# EAGLE board Board_v1 (EAGLE 9.2.2)
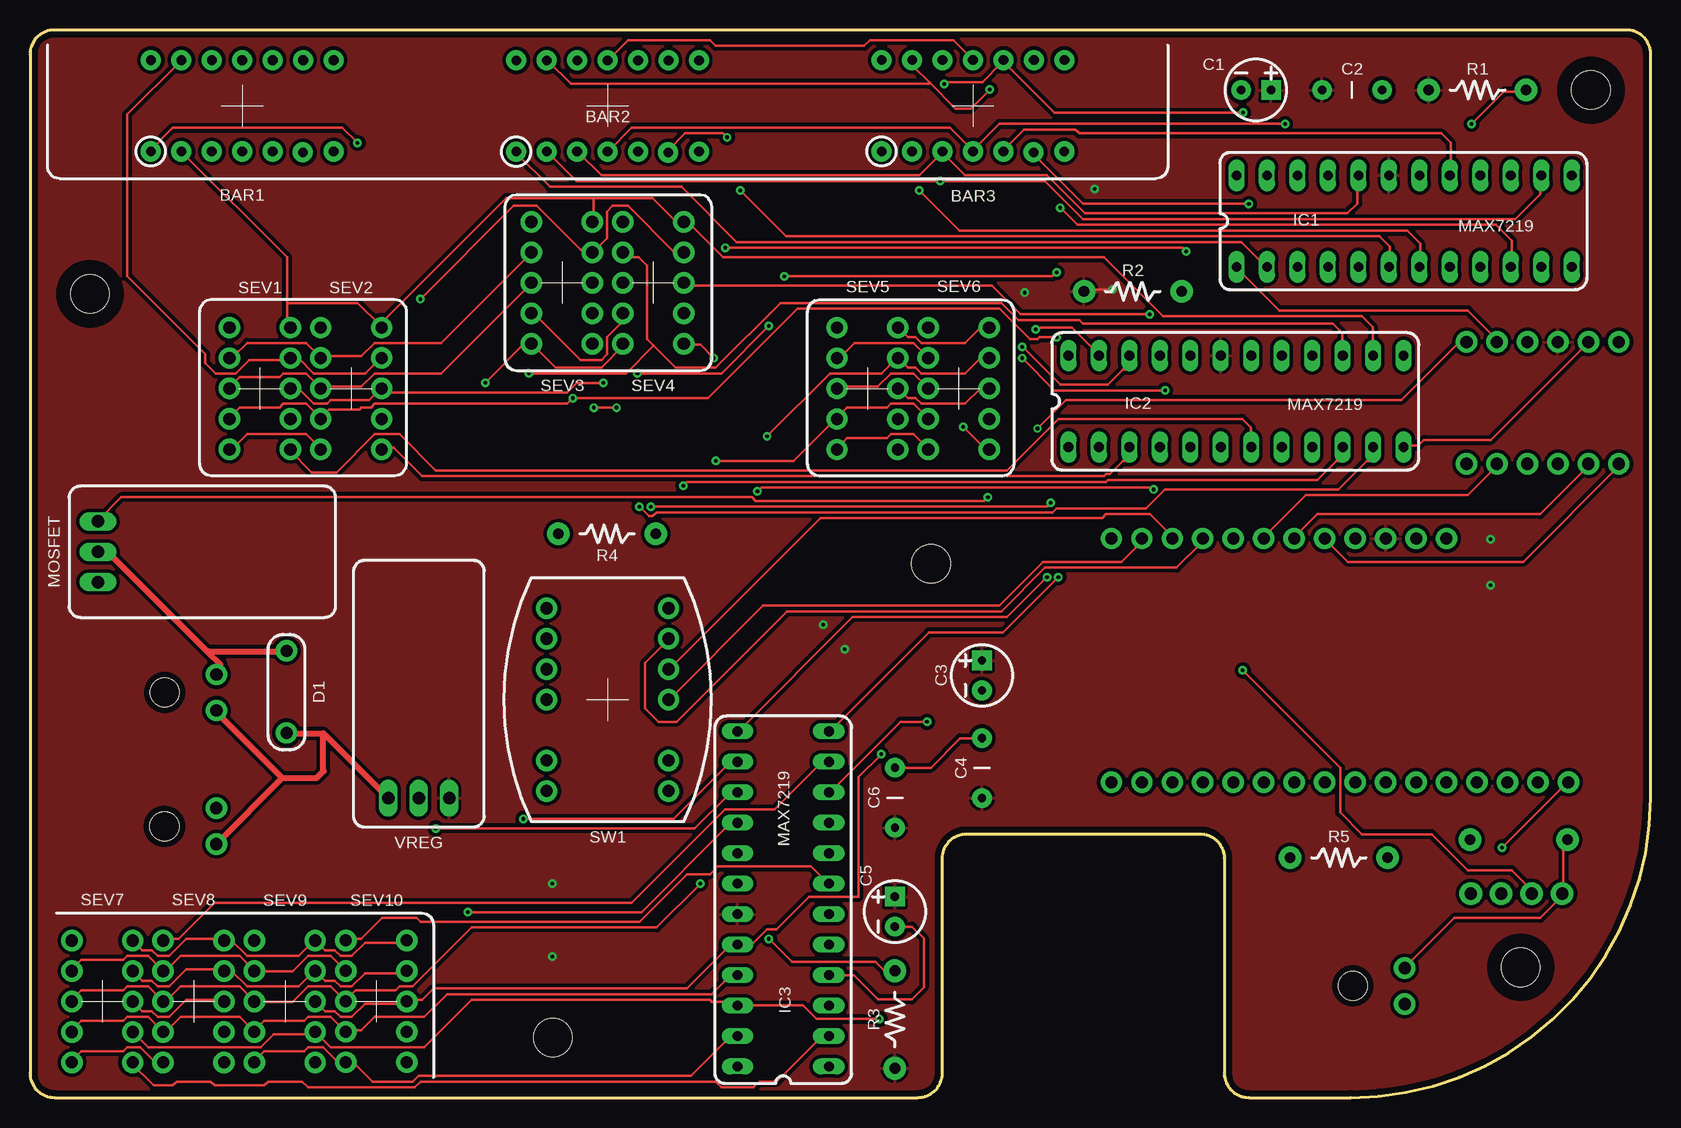
[diagram p0: board, top side]
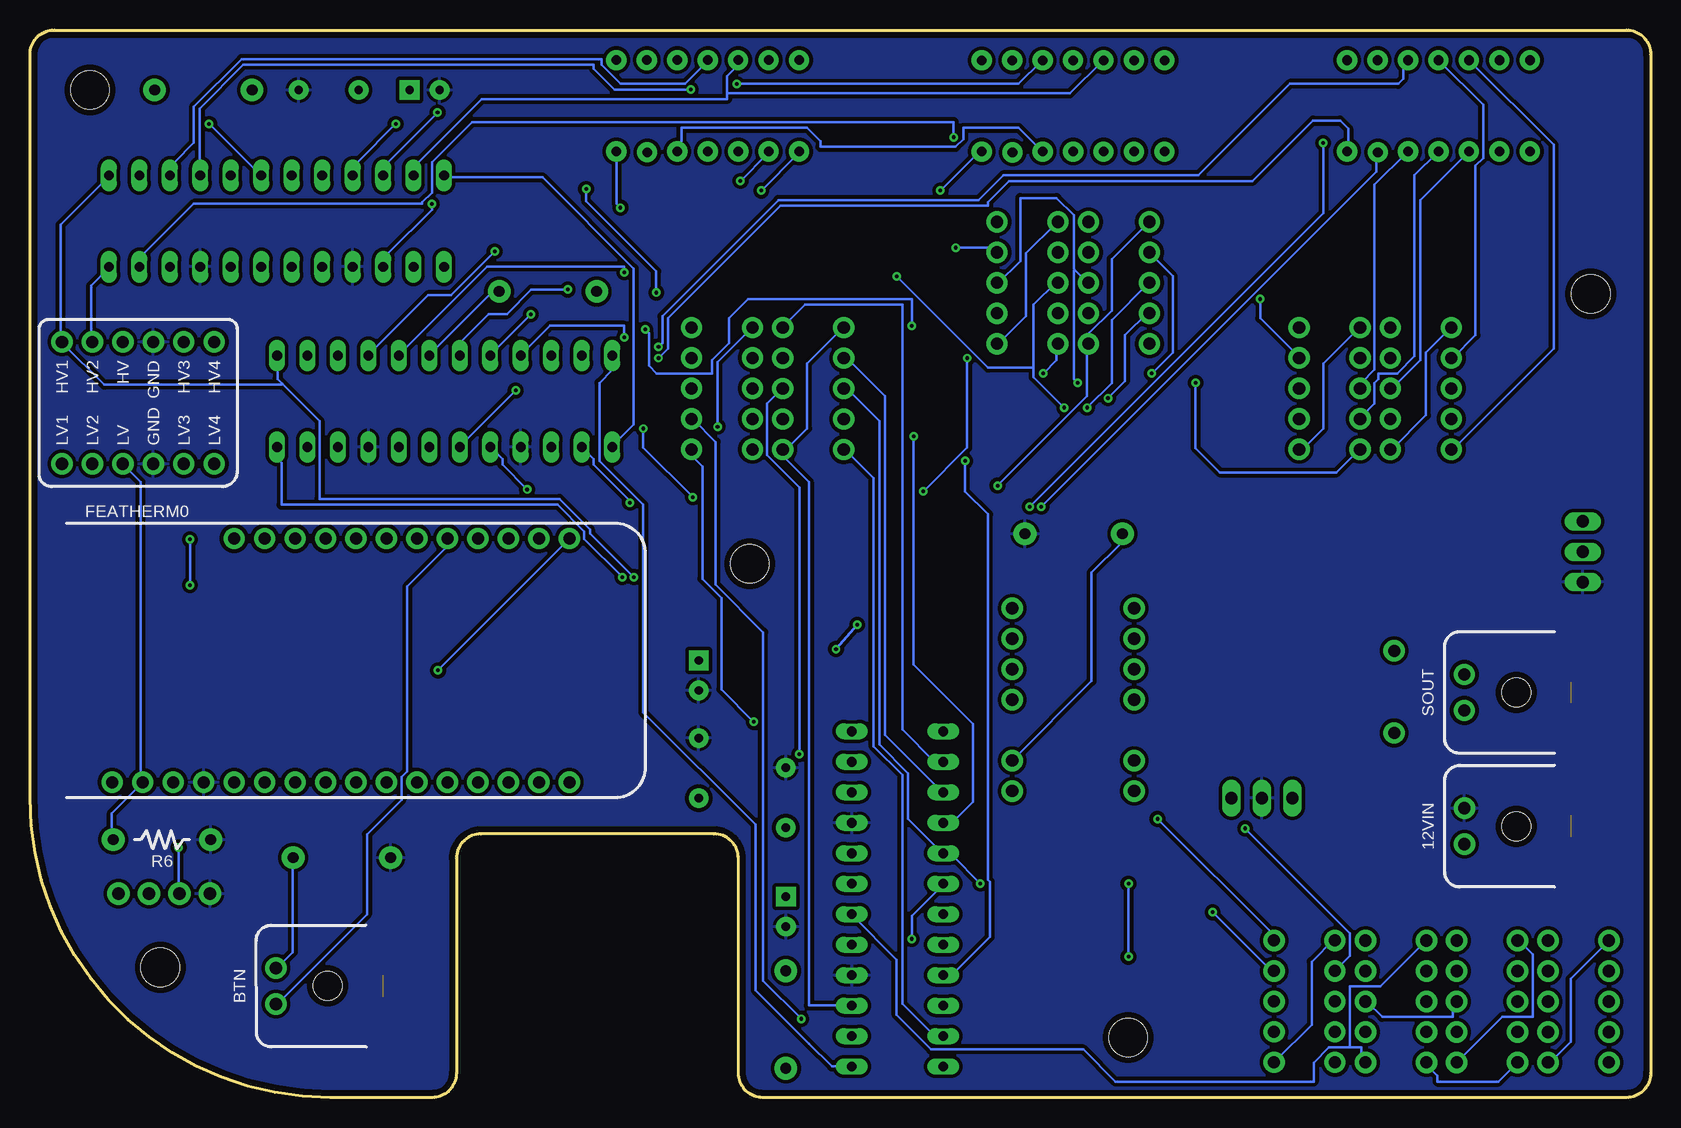
[diagram p1: board, bottom side, seen from below]

Size 135.1 x 89 mm. Coordinates in mm from the lower left corner, seen from the top.
Outline: 0,86.97 0,2.03 arc90 2.03,0 74.02,0 arc90 76.05,2.03 76.05,19.95 arc-90 78.08,21.98 97.52,21.98 arc-90 99.55,19.95 99.55,2.03 arc90 101.58,0 110.1,0 arc90 135.1,25 135.1,86.97 arc90 133.07,89 2.03,89 arc90 0,86.97
Copper layers (1*16): Top 0.035mm / dielectric 1.5mm / Bottom 0.035mm
Design rules "default *": minimum track width 9mil, minimum drill 0.3mm, track to track 8mil, track to pad 8mil, pad to pad 8mil, via to via 8mil, smd to smd 6mil, copper to edge 20mil, drill to drill 10mil, minimum pad ring 10mil, minimum via ring 8mil, stop-mask expansion 4mil, vias tented up to drill 0mil, thermal gap 10mil
Holes 3.2 mm at 43.57,5 124.24,10.86 75.1,44.5 5,67 130.1,84
tRestrict: area 122.3,8.8 to 126.3,12.8; area 128.1,82 to 132.1,86; area 41.6,3 to 45.6,7; area 3,65 to 7,69; area 73.1,42.6 to 77.1,46.6

## Footprints (pad centres in the part's own frame; a part is rotated, then mirrored left to right if it is on the bottom)
MICRO-FIT_43560_3MM = drill 1.016 pad 1.778: P$1 1.5,0; P$2 -1.5,0 | hole 2.41: 0,-4.32
SEGMENT_BICOL_BL-AR12Z3010 = drill 0.8 pad 1.676: 1 -3.803,7.621; 2 -3.803,5.081; 3 -3.803,2.541; 4 -3.803,0.001; 5 -3.803,-2.539; 6 -3.879,-5.054; 7 -3.803,-7.619; 8 3.803,-7.621; 9 3.803,-5.081; 10 3.803,-2.541; 11 3.803,-0.001; 12 3.803,2.539; 13 3.803,5.079; 14 3.803,7.619
CPOL-RADIAL-2.5MM-5MM-KIT = drill 0.7 pad 1.651 square: 1 1.25,0 | drill 0.7 pad 1.651: 2 -1.25,0
CAP-PTH-5MM = drill 0.7 pad 1.651: 1 -2.5,0; 2 2.5,0
3-5V_LOGIC_LVL_CONV = drill 1.016 pad 1.778: 1 -6.35,5.08; 2 -3.81,5.08; 3 -1.27,5.08; 5 3.81,5.08; 6 6.35,5.08; 7 -6.35,-5.08; 8 -3.81,-5.08; 9 -1.27,-5.08; 11 3.81,-5.08; 12 6.35,-5.08; GND 1.27,5.08; GND2 1.27,-5.08
CASE59−10-AXIAL = drill 1.016 pad 1.778: ANOD -3.445,0; CAT 3.397,0
FEATHER = drill 1 pad 1.778: 1 6.35,1.27; 2 8.89,1.27; 3 11.43,1.27; 4 13.97,1.27; 5 16.51,1.27; 6 19.05,1.27; 7 21.59,1.27; 8 24.13,1.27; 9 26.67,1.27; 10 29.21,1.27; 11 31.75,1.27; 12 34.29,1.27; 13 36.83,1.27; 14 39.37,1.27; 15 41.91,1.27; 16 44.45,1.27; 17 44.45,21.59; 18 41.91,21.59; 19 39.37,21.59; 20 36.83,21.59; 21 34.29,21.59; 22 31.75,21.59; 23 29.21,21.59; 24 26.67,21.59; 25 24.13,21.59; 26 21.59,21.59; 27 19.05,21.59; 28 16.51,21.59
DIL24-3 = drill 0.813 long: 1 -13.97,-3.81; 2 -11.43,-3.81; 3 -8.89,-3.81; 4 -6.35,-3.81; 5 -3.81,-3.81; 6 -1.27,-3.81; 7 1.27,-3.81; 8 3.81,-3.81; 9 6.35,-3.81; 10 8.89,-3.81; 11 11.43,-3.81; 12 13.97,-3.81; 13 13.97,3.81; 14 11.43,3.81; 15 8.89,3.81; 16 6.35,3.81; 17 3.81,3.81; 18 1.27,3.81; 19 -1.27,3.81; 20 -3.81,3.81; 21 -6.35,3.81; 22 -8.89,3.81; 23 -11.43,3.81; 24 -13.97,3.81
1X04_NO_SILK = drill 1.016 pad 1.88: 1 0,0; 2 2.54,0; 3 5.08,0; 4 7.62,0
TO-220-ALT = drill 1.016 long: GND 0,0.19; IN -2.54,0.19; OUT 2.54,0.19
AXIAL-0.3 = drill 0.9 pad 1.88: P$1 -4.064,0; P$2 4.064,0
HDSP-7503-C = drill 1.016 pad 1.778: 1 -2.54,5.08; 2 -2.54,2.54; 3 -2.54,0; 4 -2.54,-2.54; 5 -2.54,-5.08; 6 2.54,-5.08; 7 2.54,-2.54; 8 2.54,0; 9 2.54,2.54; 10 2.54,5.08
MRB24B_SP3T = drill 1.016 pad 1.778: 1 5.08,5.08; 2 5.08,2.54; 3 5.08,0; 4 -5.08,5.08; 5 -5.08,2.54; 6 -5.08,0; B1 5.08,-7.62; B2 -5.08,-7.62; B3 5.08,7.62; B4 -5.08,7.62; C1 5.08,-5.08; C2 -5.08,-5.08

## Placement (x,y rotation side)
12VIN  CONN3  [MICRO-FIT_43560_3MM]  15.53,22.62 90 bottom
BAR1  KWL-R1230CDUGB  [SEGMENT_BICOL_BL-AR12Z3010]  17.69,82.68 90 top
BAR2  KWL-R1230CDUGB  [SEGMENT_BICOL_BL-AR12Z3010]  48.15,82.67 90 top
BAR3  KWL-R1230CDUGB  [SEGMENT_BICOL_BL-AR12Z3010]  78.61,82.68 90 top
BTN  CONN1  [MICRO-FIT_43560_3MM]  114.59,9.3 90 bottom
C1  10uF  [CPOL-RADIAL-2.5MM-5MM-KIT]  102.2,84 0 top
C2  100nF  [CAP-PTH-5MM]  110.2,84 0 top
C3  10uF  [CPOL-RADIAL-2.5MM-5MM-KIT]  79.36,35.19 90 top
C4  100nF  [CAP-PTH-5MM]  79.36,27.46 90 top
C5  10uF  [CPOL-RADIAL-2.5MM-5MM-KIT]  72.09,15.5 90 top
C6  100nF  [CAP-PTH-5MM]  72.1,25 90 top
CONV  LOGIC LVL CONV  [3-5V_LOGIC_LVL_CONV]  126.09,57.91 0 bottom
D1  1N4001  [CASE59−10-AXIAL]  21.38,33.79 270 top
FEATHERM0  FEATHERWING_NODIM  [FEATHER]  134.59,25.01 0 bottom
IC1  MAX7219  [DIL24-3]  114.55,73.07 0 top
IC2  MAX7219  [DIL24-3]  100.54,58.04 0 top
IC3  MAX7219  [DIL24-3]  62.78,16.55 90 top
J1  [1X04_NO_SILK]  120.1,17 0 top
MOSFET  IRLB872  [TO-220-ALT]  5.47,45.5 270 top
R1  28k  [AXIAL-0.3]  120.65,84 0 top
R2  28k  [AXIAL-0.3]  91.93,67.2 0 top
R3  23k  [AXIAL-0.3]  72.09,6.5 90 top
R4  10k  [AXIAL-0.3]  48.1,47 180 top
R5  10k  [AXIAL-0.3]  109.1,20 0 top
R6  10k  [AXIAL-0.3]  124.1,21.5 180 bottom
SEV1  SEV-SEG_7503  [HDSP-7503-C]  19.16,59.11 0 top
SEV2  SEV-SEG_7503  [HDSP-7503-C]  26.77,59.11 0 top
SEV3  SEV-SEG_7503  [HDSP-7503-C]  44.34,67.93 0 top
SEV4  SEV-SEG_7503  [HDSP-7503-C]  51.96,67.92 0 top
SEV5  SEV-SEG_7503  [HDSP-7503-C]  69.81,59.11 0 top
SEV6  SEV-SEG_7503  [HDSP-7503-C]  77.42,59.11 0 top
SEV7  SEV-SEG_7503  [HDSP-7503-C]  6.03,8 0 top
SEV8  SEV-SEG_7503  [HDSP-7503-C]  13.63,8.01 0 top
SEV9  SEV-SEG_7503  [HDSP-7503-C]  21.24,8.01 0 top
SEV10  SEV-SEG_7503  [HDSP-7503-C]  28.86,8.01 0 top
SOUT  CONN2  [MICRO-FIT_43560_3MM]  15.54,33.77 90 bottom
SW1  ROTARY SWITCH  [MRB24B_SP3T]  48.15,33.17 0 top
VREG  L7805CV  [TO-220-ALT]  32.41,24.77 0 top

## Library data of the parts
12VIN BAR1-BAR3 BTN C1-C6 CONV D1 FEATHERM0 MOSFET R1-R6 SEV1-SEV10 SOUT SW1 VREG = AES_lib
IC1-IC3 = AES_lib; MF: MAXIM; MPN: MAX7219CNG; OC_FARNELL: 1523914; OC_NEWARK: 34C4018
J1 = SparkFun-Connectors; PROD_ID: CONN-09696

## Nets
3.3V: BTN.P$1 CONV.9 FEATHERM0.2 J1.4 R5.P$2 R6.P$2
5V: C1.1 C2.1 C3.1 C4.1 C5.1 C6.1 CONV.3 FEATHERM0.26 IC1.19 IC2.19 IC3.19 R1.P$1 R2.P$1 R3.P$1 VREG.OUT
12V: 12VIN.P$2 D1.CAT SOUT.P$2 VREG.IN
BTN: BTN.P$2 FEATHERM0.21
CLK: CONV.1 IC1.13 IC2.13 IC3.13
CLK3: CONV.7 FEATHERM0.24
DIG01: BAR2.1 IC1.2
DIG02: BAR1.1 IC2.2
DIG03: IC3.2 SEV7.1 SEV7.6
DIG11: BAR2.6 IC1.11
DIG12: BAR1.6 IC2.11
DIG13: IC3.11 SEV8.1 SEV8.6
DIG21: BAR2.7 IC1.6
DIG22: BAR1.7 IC2.6
DIG23: IC3.6 SEV9.1 SEV9.6
DIG31: BAR3.1 IC1.7
DIG32: IC2.7 SEV1.1 SEV1.6
DIG33: IC3.7 SEV10.1 SEV10.6
DIG41: BAR3.6 IC1.3
DIG42: IC2.3 SEV2.1 SEV2.6
DIG43: IC3.3 SEV5.1 SEV5.6
DIG51: BAR3.7 IC1.10
DIG52: IC2.10 SEV3.1 SEV3.6
DIG53: IC3.10 SEV6.1 SEV6.6
DIG62: IC2.5 SEV4.1 SEV4.6
DIN: CONV.5 IC1.1
DIN3: CONV.11 FEATHERM0.22
GND: 12VIN.P$1 C1.2 C2.2 C3.2 C4.2 C5.2 C6.2 CONV.GND CONV.GND2 FEATHERM0.4 IC1.4 IC1.9 IC2.4 IC2.9 IC3.4 IC3.9 J1.1 MOSFET.OUT R4.P$1 R5.P$1 R6.P$1 VREG.GND
LOAD: CONV.2 IC1.12 IC2.12 IC3.12
LOAD3: CONV.8 FEATHERM0.23
N$1: IC1.18 R1.P$2
N$2: D1.ANOD MOSFET.GND SOUT.P$1
N$3: CONV.6 MOSFET.IN
N$7: R4.P$2 SW1.C1
N$8: IC3.18 R3.P$2
N$9: IC2.18 R2.P$2
N$13: IC1.24 IC2.1
N$14: IC2.24 IC3.1
RESET: FEATHERM0.1 J1.2
S1: FEATHERM0.20 SW1.1
S2: FEATHERM0.19 SW1.2
S3: FEATHERM0.18 SW1.3
SEGA1: BAR2.2 BAR3.2 IC1.14
SEGA2: BAR1.2 IC2.14 SEV1.10 SEV2.10 SEV3.10 SEV4.10
SEGA3: IC3.14 SEV5.10 SEV6.10 SEV7.10 SEV8.10 SEV9.10 SEV10.10
SEGB1: BAR2.13 BAR3.13 IC1.16
SEGB2: BAR1.13 IC2.16 SEV1.9 SEV2.9 SEV3.9 SEV4.9
SEGB3: IC3.16 SEV5.9 SEV6.9 SEV7.9 SEV8.9 SEV9.9 SEV10.9
SEGC1: BAR2.3 BAR3.3 IC1.20
SEGC2: BAR1.3 IC2.20 SEV1.8 SEV2.8 SEV3.8 SEV4.8
SEGC3: IC3.20 SEV5.8 SEV6.8 SEV7.8 SEV8.8 SEV9.8 SEV10.8
SEGD1: BAR2.12 BAR3.12 IC1.23
SEGD2: BAR1.12 IC2.23 SEV1.5 SEV2.5 SEV3.5 SEV4.5
SEGD3: IC3.23 SEV5.5 SEV6.5 SEV7.5 SEV8.5 SEV9.5 SEV10.5
SEGDP1: BAR2.10 BAR3.10 IC1.22
SEGDP2: BAR1.10 IC2.22
SEGDP3: IC3.22 SEV6.7 SEV7.7 SEV9.7
SEGE1: BAR2.4 BAR3.4 IC1.21
SEGE2: BAR1.4 IC2.21 SEV1.4 SEV2.4 SEV3.4 SEV4.4
SEGE3: IC3.21 SEV5.4 SEV6.4 SEV7.4 SEV8.4 SEV9.4 SEV10.4
SEGF1: BAR2.11 BAR3.11 IC1.15
SEGF2: BAR1.11 IC2.15 SEV1.2 SEV2.2 SEV3.2 SEV4.2
SEGF3: IC3.15 SEV5.2 SEV6.2 SEV7.2 SEV8.2 SEV9.2 SEV10.2
SEGG1: BAR2.5 BAR3.5 IC1.17
SEGG2: BAR1.5 IC2.17 SEV1.3 SEV2.3 SEV3.3 SEV4.3
SEGG3: IC3.17 SEV5.3 SEV6.3 SEV7.3 SEV8.3 SEV9.3 SEV10.3
STA: FEATHERM0.17 J1.3

## Tracks (layer width: path | path; a pad name or v marks a point on that pad's centre or on a via)
3.3V
  Top 0.229: R6.P$2 128.11,21.48 127.79,21.48 127.79,17.04 J1.4 127.79,16.88 125.89,14.97 118.75,14.97 114.62,10.84 BTN.P$1
  Bottom 0.229: BTN.P$1 114.46,10.84 113.19,12.12 113.19,19.89 R5.P$2 | R6.P$2 128.27,21.64 128.27,23.7 125.73,26.24 FEATHERM0.2 125.89,26.24 125.89,51.33 127.32,52.76 CONV.9
5V  (via drill 0.3)
  Top 0.229: v90.27,67.36 88.02,67.36 R2.P$1
  Bottom 0.229: v43.53,17.83 v43.53,11.73 | IC2.19 99.27,62.93 96.87,65.33 95.35,65.33 93.31,67.36 v90.27,67.36 | v121.76,46.53 v121.76,42.72 | v66.14,39.42 v67.91,37.39 | v82.9,67.11 82.9,68.88 88.74,74.73 v88.74,75.74
  pour Top (isolate 0.305): 98.91,89 0,89 0,0 76.05,0 76.05,21.98 99.55,21.98 99.55,0 110.1,0 arc90 135.1,25 135.1,89 114.4,88.95
12V
  Top 0.229: 29.85,24.97 VREG.IN | 21.43,30.37 D1.CAT | 15.56,21.16 12VIN.P$2 | 15.56,32.12 SOUT.P$2
  Top 0.508: 24.45,30.37 24.69,30.13 | 24.69,30.13 29.85,24.97 | 21.43,30.37 24.45,30.37 | 21.03,26.64 15.56,21.16 | 24.45,30.05 24.61,30.05 24.69,30.13 | 21.03,26.64 15.56,32.12 | 21.03,26.64 23.89,26.64 24.48,27.23 24.45,27.26 24.45,30.37
BTN
  Bottom 0.229: BTN.P$2 114.46,7.83 107,15.29 107,21.96 104.14,24.82 104.14,26.72 103.66,27.2 103.66,42.59 100.33,45.93 100.33,46.56 FEATHERM0.21
CLK  (via drill 0.3)
  Top 0.229: v84.77,43.39 81.44,40.05 68.58,40.05 59.06,30.53 IC3.13
  Bottom 0.229: IC1.13 128.59,76.73 132.56,72.76 132.56,63.07 CONV.1 132.4,62.91 128.91,59.42 114.14,59.42 114.06,59.5 | v84.77,43.39 88.42,47.04 88.42,47.36 90.96,49.9 110.97,49.9 110.97,56.41 114.06,59.5 | 114.06,59.5 114.46,59.9 114.46,61.8 IC2.13
CLK3
  Top 0.229: FEATHERM0.24 107.95,46.56 109.86,44.66 124.46,44.66 132.56,52.76 CONV.7
DIG01
  Top 0.229: IC1.2 103.03,69.27 100.97,71.33 58.9,71.33 54.29,75.93 43.34,75.93 40.48,78.79 BAR2.1
DIG02  (via drill 0.3)
  Top 0.229: v85.09,49.58 84.77,49.26 v51.75,49.26 | v27.31,79.58 26.04,80.85 11.91,80.85 10,78.95 BAR1.1
  Bottom 0.229: v85.09,49.58 85.09,49.74 88.11,52.76 88.11,53.23 89.06,54.18 IC2.2 | v51.75,49.26 27.31,73.71 v27.31,79.58
DIG03
  Top 0.229: IC3.2 66.52,4.97 66.2,4.65 65.56,4.65 62.23,1.32 60.8,1.32 60.33,0.84 57.63,0.84 57.15,1.32 32.54,1.32 32.07,0.84 23.18,0.84 22.7,1.32 19.84,1.32 19.53,1 15.4,1 15.08,1.32 12.22,1.32 11.91,1 10.32,1 8.41,2.91 SEV7.6
  Bottom 0.229: SEV7.1 3.49,13.07 6.67,9.89 6.67,4.65 8.41,2.91 SEV7.6
DIG11  (via drill 0.3)
  Top 0.229: v58.1,80.06 57.79,80.38 54.61,80.38 53.18,78.95 BAR2.6
  Bottom 0.229: v58.1,80.06 58.1,81.33 98.27,81.33 101.6,78 101.6,75.46 102.39,74.66 102.39,74.5 121.44,74.5 125.57,70.38 125.57,69.58 125.89,69.27 IC1.11
DIG12  (via drill 0.3)
  Top 0.229: v50.8,49.26 51.59,48.47 51.91,48.47 52.23,48.79 85.25,48.79 85.57,49.1 93.03,49.1 94.62,50.69 109.06,50.69 111.44,53.07 111.92,53.07 111.92,54.18 IC2.11
  Bottom 0.229: v50.8,49.26 22.86,77.2 22.86,78.79 BAR1.6
DIG13
  Top 0.229: IC3.11 66.52,27.83 66.2,27.51 65.56,27.51 62.07,24.02 57.94,24.02 50.17,16.24 15.4,16.24 12.38,13.23 11.11,13.23 SEV8.1
  Bottom 0.229: SEV8.6 16.03,3.07 12.38,6.72 9.84,6.72 9.84,11.96 10.95,13.07 SEV8.1
DIG21  (via drill 0.3)
  Top 0.229: v59.21,75.61 63.02,71.81 112.49,71.81 113.35,70.95 113.35,69.27 IC1.6
  Bottom 0.229: v59.21,75.61 55.88,78.95 BAR2.7
DIG22  (via drill 0.3)
  Top 0.229: v94.62,58.95 85.41,58.95 v82.71,61.64
  Bottom 0.229: v94.62,58.95 99.22,54.34 IC2.6 | v82.71,61.64 81.92,62.44 81.92,64.98 72.55,74.34 55.25,74.34 55.25,74.66 53.5,76.41 33.21,76.41 28.16,81.46 25.88,81.46 25.21,80.79 25.21,78.98 BAR1.7
DIG23
  Bottom 0.229: 25.08,4.18 24.13,4.18 24.13,3.54 23.81,3.23 23.81,3.07 SEV9.6 | 25.08,4.18 26.83,4.18 28.1,2.91 28.1,1.32 44.61,1.32 47.31,4.02 60.01,4.02 62.87,6.88 62.87,11.48 66.52,15.13 IC3.6 | 25.08,4.18 25.08,9.26 22.54,9.26 18.73,13.07 SEV9.1
DIG31  (via drill 0.3)
  Top 0.229: v74.14,75.61 77.47,72.28 114.81,72.28 115.89,71.2 115.89,69.27 IC1.7
  Bottom 0.229: v74.14,75.61 71.12,78.63 71.12,78.79 BAR3.1
DIG32
  Top 0.229: IC2.7 101.76,54.34 101.76,55.87 101.06,56.56 85.73,56.56 81.44,52.28 33.81,52.28 30.8,55.3 28.73,55.3 25.56,52.12 23.5,52.12 21.59,54.02 SEV1.6
  Bottom 0.229: SEV1.1 16.67,64.19 18.73,62.12 18.73,56.88 21.59,54.02 SEV1.6
DIG33
  Top 0.229: IC3.7 66.52,17.83 65.09,19.26 57.31,19.26 56.67,18.62 54.77,18.62 50.8,14.66 32.54,14.66 32.23,14.97 29.37,14.97 27.62,13.23 26.35,13.23 SEV10.1
  Bottom 0.229: SEV10.6 31.27,3.07 28.26,6.08 28.26,11.32 26.35,13.23 SEV10.1
DIG41  (via drill 0.3)
  Top 0.229: v101.6,74.5 87.79,74.5 83.5,78.79 BAR3.6
  Bottom 0.229: v101.6,74.5 101.6,74.03 105.25,70.38 105.25,69.58 105.57,69.27 IC1.3
DIG42
  Top 0.229: IC2.3 91.6,54.18 91.6,53.07 91.12,53.07 90.01,51.96 89.69,51.96 89.54,51.8 32.7,51.8 30.32,54.18 29.37,54.18 SEV2.6
  Bottom 0.229: SEV2.1 24.29,64.19 27.31,61.17 27.31,55.77 28.89,54.18 29.21,54.18 SEV2.6
DIG43
  Bottom 0.229: 72.23,53.87 72.23,54.02 SEV5.6 72.23,53.87 | 72.23,53.87 72.23,53.39 70.17,51.33 70.17,7.67 66.68,7.67 IC3.3 | 72.23,53.87 70.33,55.77 70.33,61.17 67.31,64.19 SEV5.1
DIG51  (via drill 0.3)
  Top 0.229: v85.88,74.19 87.31,72.76 122.21,72.76 123.51,71.46 123.51,69.27 IC1.10
  Bottom 0.229: v85.88,74.19 86.2,74.5 86.2,78.79 BAR3.7
DIG52  (via drill 0.3)
  Top 0.229: v54.45,51.01 54.77,51.33 89.69,51.33 89.85,51.48 107.32,51.48 108.9,53.07 109.38,53.07 109.38,54.18 IC2.10
  Bottom 0.229: v54.45,51.01 46.99,58.47 46.99,62.76 SEV3.6 46.83,62.91 46.83,63.71 44.93,65.61 44.93,69.9 41.91,72.92 SEV3.1
DIG53  (via drill 0.3)
  Top 0.229: v74.77,31.32 72.55,31.32 66.68,25.45 IC3.10 | v77.79,55.93 79.53,54.18 79.85,54.18 SEV6.6
  Bottom 0.229: v74.77,31.32 77.47,34.02 77.47,41.64 79.06,43.23 79.06,52.6 79.85,53.39 79.85,54.02 SEV6.6 | v77.79,55.93 77.79,61.33 74.93,64.19 SEV6.1
DIG62  (via drill 0.3)
  Top 0.229: v93.66,50.69 93.5,50.85 60.96,50.85 v60.64,50.53 | v56.99,61.64 55.88,62.76 54.61,62.76 SEV4.6
  Bottom 0.229: v93.66,50.69 95.73,52.76 95.73,53.23 96.68,54.18 IC2.5 | v60.64,50.53 56.99,54.18 v56.99,61.64 | SEV4.1 49.53,72.92 52.07,70.38 52.07,65.14 54.45,62.76 SEV4.6
DIN
  Top 0.229: IC1.1 100.65,69.11 104.14,65.61 119.86,65.61 122.4,63.07 CONV.5
DIN3
  Top 0.229: FEATHERM0.22 102.87,46.72 106.36,50.22 119.86,50.22 122.4,52.76 CONV.11
GND
  Top 0.229: C5.2 73.53,14.25 74.52,13.26 74.52,9.19 73.5,8.18 70.71,8.18 68.68,10.2 IC3.4 | C6.2 75.09,27.5 77.54,29.95 79.34,29.95 C4.2
  pour Bottom (isolate 0.305): 0,89 0,0 76.05,0 76.05,21.98 99.55,21.98 99.55,0 110.1,0 arc90 135.1,25 135.1,89
LOAD  (via drill 0.3)
  Top 0.229: v85.73,43.39 81.12,38.78 74.93,38.78 66.68,30.53 IC3.12 | CONV.2 129.86,62.91 121.76,54.82 116.21,54.82 115.73,54.34 114.62,54.34 IC2.12
  Bottom 0.229: IC1.12 128.59,69.11 130.02,67.68 130.02,63.07 CONV.2 | v85.73,43.39 88.9,46.56 88.9,47.2 91.12,49.42 114.14,49.42 114.14,52.91 114.46,53.23 114.46,54.18 IC2.12
LOAD3
  Top 0.229: FEATHERM0.23 105.41,46.72 107.32,48.63 125.89,48.63 130.02,52.76 CONV.8
N$1  (via drill 0.3)
  Top 0.229: v120.17,81.17 122.87,83.87 124.62,83.87 R1.P$2
  Bottom 0.229: v120.17,81.17 115.89,76.88 IC1.18
N$2
  Top 0.229: 6.19,44.98 5.72,45.45 MOSFET.GND | 15.88,35.29 15.56,35.29 SOUT.P$1 | 21.27,37.2 D1.ANOD
  Top 0.508: 6.19,44.98 6.99,44.98 14.84,37.12 | 14.84,37.12 15.88,36.09 15.88,35.29 | 21.27,37.2 14.92,37.2 14.84,37.12
N$3  (via drill 0.3)
  Top 0.229: v79.85,50.06 79.53,49.74 60.48,49.74 60.17,50.06 7.62,50.06 5.72,48.15 MOSFET.IN | v83.98,55.77 86.36,58.15 114.3,58.15 119.06,62.91 119.7,62.91 CONV.6
  Bottom 0.229: v79.85,50.06 83.98,54.18 v83.98,55.77
N$7
  Bottom 0.229: SW1.C1 53.18,28.15 46.61,34.72 46.61,43.77 44.13,46.25 44.13,46.88 R4.P$2
N$8  (via drill 0.3)
  Top 0.229: v61.6,13.23 63.5,11.32 70.49,11.32 71.28,10.53 72.07,10.53 R3.P$2
  Bottom 0.229: v61.6,13.23 61.6,15.13 59.06,17.67 IC3.18
N$9
  Bottom 0.229: IC2.18 101.76,61.96 96.52,67.2 96.04,67.2 R2.P$2
N$13
  Bottom 0.229: IC2.1 86.52,54.34 84.77,56.09 84.77,69.11 92.39,76.73 100.49,76.73 IC1.24
N$14
  Bottom 0.229: IC3.1 66.68,2.59 68.26,2.59 70.17,4.49 74.61,8.94 74.61,22.75 83.98,32.12 83.98,49.42 87.63,53.07 87.63,59.58 86.52,60.69 86.52,61.8 IC2.24
RESET  (via drill 0.3)
  Top 0.229: v122.71,20.85 128.11,26.24 FEATHERM0.1
  Bottom 0.229: v122.71,20.85 122.71,17.04 J1.2
S1
  Top 0.229: SW1.1 53.18,38.15 51.28,36.24 51.28,32.44 52.39,31.32 53.88,31.32 63.09,40.53 80.96,40.53 84.61,44.18 95.57,44.18 97.63,46.25 97.63,46.56 FEATHERM0.20
S2
  Top 0.229: SW1.2 53.34,35.77 65.88,48.31 89.38,48.31 89.69,48.63 93.35,48.63 95.25,46.72 FEATHERM0.19
S3
  Top 0.229: SW1.3 53.34,33.23 61.12,41.01 80.81,41.01 84.46,44.66 90.96,44.66 92.55,46.25 92.55,46.56 FEATHERM0.18
SEGA1  (via drill 0.3)
  Top 0.229: IC1.14 125.89,76.73 125.89,75.3 123.83,73.23 87.79,73.23 84.61,76.41 v75.88,76.41 45.56,76.41 43.18,78.79 BAR2.2
  Bottom 0.229: v75.88,76.41 73.66,78.63 73.66,78.79 BAR3.2
SEGA2
  Top 0.229: 21.43,66.25 21.43,64.34 21.59,64.34 SEV1.10 | 21.43,66.25 21.43,70.06 12.7,78.79 BAR1.2 | 21.43,66.25 27.31,66.25 29.21,64.34 SEV2.10 29.21,64.5 39.69,74.98 46.99,74.98 | IC2.14 111.92,61.96 111.92,64.25 111.03,65.14 94.46,65.14 89.54,70.06 57.79,70.06 54.93,72.92 54.61,72.92 SEV4.10 54.45,73.08 53.82,73.08 51.91,74.98 46.99,74.98 | 46.99,74.98 46.99,73.08 SEV3.10
SEGA3  (via drill 0.3)
  Top 0.229: SEV7.10 8.57,13.07 9.37,12.27 10.16,12.27 10.64,11.8 11.59,11.8 13.02,13.23 16.03,13.23 SEV8.10 16.19,13.07 16.83,13.07 18.1,11.8 22.38,11.8 23.65,13.07 SEV9.10 23.81,13.07 24.61,12.27 25.4,12.27 25.88,11.8 26.83,11.8 27.94,12.91 30.48,12.91 30.64,13.07 31.27,13.07 SEV10.10 | SEV5.10 72.39,64.19 73.18,63.39 73.82,63.39 74.3,62.91 77.95,62.91 79.22,64.19 79.85,64.19 SEV6.10 | v41.12,23.23 53.66,23.23 57.94,27.51 58.58,27.51 58.9,27.83 IC3.14
  Bottom 0.229: v41.12,23.23 31.43,13.54 31.43,13.23 SEV10.10 | SEV5.10 72.23,64.34 70.49,66.09 62.39,66.09 62.39,30.69 59.69,27.99 59.06,27.99 IC3.14
SEGB1  (via drill 0.3)
  Top 0.229: v80.01,84.03 78.42,82.44 77.15,82.44 75.01,84.58 | 75.01,84.58 73.66,85.93 73.66,86.41 BAR3.13 | BAR2.13 43.18,86.41 45.09,84.5 74.93,84.5 75.01,84.58
  Bottom 0.229: v80.01,84.03 86.36,84.03 88.11,85.78 88.11,86.09 117.32,86.09 120.97,82.44 120.97,76.88 IC1.16
SEGB2  (via drill 0.3)
  Top 0.229: BAR1.13 12.54,86.41 8.1,81.97 8.1,68.47 14.61,61.96 14.61,61.23 15.46,60.38 17.15,60.38 18.26,61.49 21.43,61.49 21.59,61.64 SEV1.9 21.75,61.64 22.38,61.64 23.65,60.38 27.94,60.38 29.21,61.64 SEV2.9 | v96.36,70.53 96.04,70.85 v57.94,70.85 | SEV4.9 54.45,70.53 53.66,70.53 49.85,74.34 48.58,74.34 48.1,73.87 48.1,71.65 46.99,70.53 SEV3.9 46.99,70.69 45.88,70.69 42.23,74.34 40.32,74.34 v32.54,66.57
  Bottom 0.229: v96.36,70.53 100.01,66.88 101.92,66.88 106.84,61.96 IC2.16 | v57.94,70.85 54.61,70.85 54.61,70.53 SEV4.9 | v32.54,66.57 32.54,64.98 29.37,61.8 SEV2.9
SEGB3  (via drill 0.3)
  Top 0.229: SEV7.9 8.57,10.53 9.37,9.73 10.16,9.73 10.64,9.26 11.59,9.26 13.02,10.69 16.03,10.69 SEV8.9 16.19,10.53 16.83,10.53 18.1,9.26 22.38,9.26 23.65,10.53 SEV9.9 23.81,10.53 24.61,9.73 25.4,9.73 25.88,9.26 26.83,9.26 27.94,10.37 30.48,10.37 30.64,10.53 31.27,10.53 SEV10.9 | SEV6.9 79.85,61.64 79.22,61.64 77.95,60.38 74.3,60.38 73.82,60.85 73.18,60.85 72.39,61.64 SEV5.9 72.23,61.64 70.96,60.38 66.68,60.38 v61.44,55.14 | v36.51,15.45 50.96,15.45 57.94,22.43 58.58,22.43 58.9,22.75 IC3.16
  Bottom 0.229: v36.51,15.45 31.75,10.69 31.43,10.69 SEV10.9 | v61.44,55.14 61.44,36.09 56.52,31.16 56.52,24.66 58.26,22.91 58.9,22.91 IC3.16
SEGC1
  Top 0.229: IC1.20 110.65,76.73 110.65,74.53 109.82,73.71 87.95,73.71 84.77,76.88 77.95,76.88 76.04,78.79 BAR3.3 76.04,78.63 75.88,78.63 74.14,76.88 47.63,76.88 45.72,78.79 BAR2.3
SEGC2  (via drill 0.3)
  Top 0.229: SEV1.8 21.75,59.11 22.38,59.11 23.65,57.84 24.77,57.84 25.08,58.15 28.26,58.15 29.21,59.11 SEV2.8 29.37,59.11 29.69,58.79 44.77,58.79 45.56,59.58 v47.78,59.58 | v93.35,65.3 82.55,65.3 80.17,67.68 55.4,67.68 55.25,67.84 54.61,67.84 SEV4.8
  Bottom 0.229: BAR1.3 15.24,78.79 19.21,74.82 19.21,61.49 21.59,59.11 SEV1.8 | v93.35,65.3 96.68,61.96 IC2.20 | 48.02,69.03 48.1,69.11 48.1,73.55 49.53,74.98 52.55,74.98 52.55,69.74 54.45,67.84 SEV4.8 | 48.02,69.03 46.99,68 SEV3.8 | v47.78,59.58 48.1,59.9 48.1,68.95 48.02,69.03
SEGC3  (via drill 0.3)
  Top 0.229: SEV7.8 8.57,7.99 9.37,7.19 10.16,7.19 10.64,6.72 11.59,6.72 13.02,8.15 16.03,8.15 SEV8.8 | SEV5.8 72.39,59.11 73.18,58.31 73.82,58.31 74.3,57.84 77.95,57.84 79.22,59.11 79.85,59.11 SEV6.8 | v70.96,28.62 69.06,26.72 69.06,16.72 64.93,16.72 62.23,14.02 61.44,14.02 59.69,12.27 58.74,12.27 IC3.20 58.9,12.59 58.58,12.27 57.94,12.27 54.77,9.1 33.66,9.1 32.7,8.15 31.43,8.15 SEV10.8 31.27,7.99 30.64,7.99 30.48,7.83 27.94,7.83 26.83,6.72 25.88,6.72 25.4,7.19 24.61,7.19 23.81,7.99 SEV9.8
  Bottom 0.229: SEV9.8 23.65,7.99 22.38,6.72 16.51,6.72 16.51,7.67 16.19,7.99 SEV8.8 | v70.96,28.62 70.96,50.85 73.66,53.55 73.66,57.84 72.39,59.11 SEV5.8
SEGD1
  Bottom 0.229: 76.99,83.71 76.99,85.14 76.2,85.93 76.2,86.41 BAR3.12 | 76.99,83.71 76.99,83.23 97.47,83.23 102.71,78 102.71,77.2 103.03,76.88 IC1.23 | 76.99,83.71 48.42,83.71 45.72,86.41 BAR2.12
SEGD2  (via drill 0.3)
  Top 0.229: SEV2.5 24.13,54.18 23.02,55.3 18.1,55.3 16.99,54.18 16.67,54.18 SEV1.5 | v83.82,64.03 83.98,64.19 86.84,64.19 89.06,61.96 IC2.23 | v61.6,64.34 57.63,60.38 v50.64,60.38 | SEV4.5 49.53,62.76 47.63,60.85 43.82,60.85 41.91,62.76 SEV3.5 41.75,62.76 41.12,62.76 v37.94,59.58
  Bottom 0.229: BAR1.12 15.08,86.41 8.1,79.42 8.1,62.44 16.51,54.02 SEV1.5 | v83.82,64.03 83.5,63.71 83.5,61.01 82.87,60.38 78.27,60.38 78.27,61.49 76.84,62.91 76.84,64.98 75.25,66.57 61.6,66.57 v61.6,64.34 | v50.64,60.38 49.53,61.49 49.53,62.76 SEV4.5 | v37.94,59.58 37.94,54.15 35.91,52.12 26.19,52.12 24.29,54.02 SEV2.5
SEGD3
  Top 0.229: SEV5.5 67.31,54.18 68.1,54.98 71.44,54.98 71.76,55.3 73.66,55.3 74.77,54.18 SEV6.5 | SEV7.5 3.49,3.07 4.29,3.86 7.78,3.86 8.1,4.18 9.21,4.18 10.32,3.07 10.95,3.07 SEV8.5 | IC3.23 58.9,4.97 58.58,4.65 57.94,4.65 55.09,1.8 32.39,1.8 31.91,1.32 28.58,1.32 26.99,2.91 26.35,2.91 SEV10.5 26.19,3.07 25.56,3.07 24.45,4.18 23.18,4.18 22.86,3.86 19.53,3.86 18.73,3.07 SEV9.5
  Bottom 0.229: SEV8.5 11.11,2.91 12.7,1.32 17.78,1.32 17.78,1.8 18.57,2.59 18.57,2.91 SEV9.5 | SEV5.5 67.15,54.02 64.77,51.64 64.77,29.26 62.39,26.88 62.39,7.83 59.69,5.13 59.06,5.13 IC3.23
SEGDP1  (via drill 0.3)
  Top 0.229: v101.12,82.12 85.41,82.12 81.12,86.41 BAR3.10 81.12,86.25 80.96,86.25 79.38,84.66 76.36,84.66 v76.2,84.5
  Bottom 0.229: v101.12,82.12 105.25,78 105.25,77.2 105.57,76.88 IC1.22 | v76.2,84.5 52.71,84.5 50.8,86.41 BAR2.10
SEGDP2  (via drill 0.3)
  Top 0.229: v82.71,62.6 85.88,59.42 89.85,59.42 91.12,60.69 91.6,60.69 91.6,61.8 IC2.22
  Bottom 0.229: v82.71,62.6 82.39,62.91 82.39,65.14 72.71,74.82 56.04,74.82 53.98,76.88 37.69,76.88 30.07,84.5 21.05,84.5 20.64,84.92 20.64,86.09 20.32,86.41 BAR1.10
SEGDP3  (via drill 0.3)
  Top 0.229: SEV7.7 8.57,5.45 9.84,4.18 19.21,4.18 20.32,5.29 23.81,5.29 SEV9.7 23.81,5.45 25.08,4.18 32.86,4.18 36.83,8.15 56.67,8.15 56.83,7.99 58.58,7.99 58.9,7.67 IC3.22 59.06,7.67 64.45,7.67 65.56,6.56 v70.8,6.56
  Bottom 0.229: v70.8,6.56 73.98,9.73 73.98,38.78 77.95,42.75 77.95,54.66 79.85,56.56 SEV6.7
SEGE1  (via drill 0.3)
  Top 0.229: v104.62,81.17 80.81,81.17 78.58,78.95 BAR3.4 78.58,79.11 78.42,79.11 76.68,80.85 50.17,80.85 48.26,78.95 BAR2.4
  Bottom 0.229: v104.62,81.17 107.79,78 107.79,77.2 108.11,76.88 IC1.21
SEGE2  (via drill 0.3)
  Top 0.229: SEV1.4 16.67,56.72 17.46,57.52 20.8,57.52 21.11,57.84 23.02,57.84 24.13,56.72 SEV2.4 24.29,56.72 24.92,57.36 27.46,57.36 27.62,57.52 28.42,57.52 28.73,57.84 44.77,57.84 v45.24,58.31 56.52,58.31 63.98,65.77 80.81,65.77 83.34,63.23 83.98,63.23 84.14,63.39 v85.57,63.39 | SEV4.4 49.37,65.3 49.37,64.66 48.1,63.39 48.1,61.96 47.63,61.49 45.88,61.49 42.07,65.3 41.91,65.3 SEV3.4
  Bottom 0.229: BAR1.4 17.78,78.79 19.69,76.88 19.69,61.8 21.11,60.38 22.7,60.38 22.7,59.9 23.02,59.58 23.02,57.84 24.13,56.72 SEV2.4 | v85.57,63.39 85.57,64.34 91.76,64.34 94.14,61.96 IC2.21 | v45.24,58.31 43.82,59.74 43.82,63.55 41.91,65.45 SEV3.4
SEGE3  (via drill 0.3)
  Top 0.229: SEV7.4 3.49,5.61 4.29,6.4 7.78,6.4 8.1,6.72 9.84,6.72 10.95,5.61 SEV8.4 11.11,5.61 11.43,5.61 12.54,6.72 17.46,6.72 18.57,5.61 SEV9.4 18.73,5.61 19.53,6.4 22.86,6.4 23.18,6.72 25.08,6.72 26.19,5.61 SEV10.4 26.35,5.61 27.62,5.61 28.73,6.72 32.86,6.72 34.77,8.62 56.83,8.62 57.94,9.73 58.58,9.73 58.9,10.05 IC3.21 | SEV6.4 74.77,56.72 73.66,57.84 71.76,57.84 71.44,57.52 68.1,57.52 67.31,56.72 SEV5.4 67.15,56.56 63.66,53.07 v57.15,53.07
  Bottom 0.229: v57.15,53.07 57.15,50.53 55.25,48.63 55.25,18.15 55.09,17.99 55.09,13.39 58.26,10.21 58.9,10.21 IC3.21
SEGF1
  Top 0.229: BAR2.11 48.26,86.57 49.85,88.16 56.67,88.16 57.15,87.68 69.53,87.68 70.01,88.16 76.99,88.16 78.58,86.57 BAR3.11
  Bottom 0.229: IC1.15 123.35,76.88 123.03,77.2 123.03,78 121.44,79.58 121.44,82.6 117.48,86.57 87.47,86.57 87.47,86.09 85.88,84.5 80.49,84.5 78.74,86.25 78.74,86.41 BAR3.11
SEGF2  (via drill 0.3)
  Top 0.229: SEV1.2 16.67,61.8 16.99,61.8 18.1,62.91 23.02,62.91 24.13,61.8 SEV2.2 24.29,61.8 27.62,61.8 28.73,62.91 34.29,62.91 41.75,70.38 SEV3.2 | 51.99,62.68 51.44,63.23 51.44,69.36 50.74,70.06 49.85,70.06 49.53,70.38 SEV4.2 | 51.99,62.68 53.82,60.85 57.15,60.85 62.55,66.25 80.96,66.25 82.39,64.82 87.47,64.82 87.79,64.5 108.62,64.5 109.38,63.74 109.38,61.96 IC2.15 | v41.59,60.38 49.69,60.38 51.99,62.68
  Bottom 0.229: BAR1.11 17.62,86.41 13.97,82.76 13.97,78.31 14.61,77.68 14.61,63.55 16.51,61.64 SEV1.2 | v41.59,60.38 39.85,62.12 39.85,68.47 41.75,70.38 SEV3.2
SEGF3  (via drill 0.3)
  Top 0.229: SEV7.2 3.49,10.69 4.29,11.48 7.78,11.48 8.1,11.8 9.84,11.8 10.95,10.69 SEV8.2 11.11,10.69 11.43,10.69 12.54,11.8 17.46,11.8 18.57,10.69 SEV9.2 18.73,10.53 21.91,10.53 23.18,11.8 25.08,11.8 26.19,10.69 SEV10.2 | SEV6.2 74.77,61.8 73.66,62.91 68.74,62.91 67.63,61.8 67.31,61.8 SEV5.2 | v33.81,22.43 55.4,22.43 58.26,25.29 58.9,25.29 IC3.15
  Bottom 0.229: IC3.15 59.06,25.45 63.82,30.21 63.82,58.47 67.15,61.8 SEV5.2 | v33.81,22.43 25.08,13.7 25.08,11.8 26.19,10.69 SEV10.2
SEGG1
  Top 0.229: IC1.17 118.43,76.88 118.43,79.58 117.63,80.38 87.47,80.38 87.16,80.69 82.87,80.69 81.12,78.95 BAR3.5
  Bottom 0.229: BAR2.5 50.8,78.95 52.71,80.85 57.31,80.85 57.31,79.9 57.94,79.27 69.22,79.27 69.22,79.74 70.33,80.85 80.81,80.85 80.81,79.74 81.12,79.42 81.12,78.95 BAR3.5
SEGG2  (via drill 0.3)
  Top 0.229: SEV1.3 16.67,59.26 17.46,60.06 20.8,60.06 21.11,60.38 23.02,60.38 24.13,59.26 SEV2.3 24.29,59.26 27.62,59.26 28.73,60.38 34.29,60.38 41.75,67.84 SEV3.3 | v85.57,68.79 85.25,68.47 v62.87,68.47 | v48.9,57.52 v46.99,57.52
  Bottom 0.229: BAR1.5 20.32,78.79 23.02,76.09 23.02,60.69 24.13,59.58 24.13,59.26 SEV2.3 | v85.57,68.79 85.57,69.27 97,69.27 104.3,61.96 IC2.17 | v62.87,68.47 55.25,60.85 51.44,60.85 | 51.44,60.85 51.44,66.09 49.53,68 SEV4.3 | v46.99,57.52 44.93,59.58 44.93,64.82 41.91,67.84 SEV3.3 | v48.9,57.52 51.44,60.06 51.44,60.85
SEGG3  (via drill 0.3)
  Top 0.229: SEV7.3 3.49,8.15 4.29,8.94 7.78,8.94 8.1,9.26 9.84,9.26 10.95,8.15 SEV8.3 11.11,8.15 11.43,8.15 12.54,9.26 17.46,9.26 18.57,8.15 SEV9.3 18.73,7.99 21.91,7.99 23.18,9.26 25.08,9.26 26.19,8.15 SEV10.3 26.35,8.15 27.15,8.94 30.48,8.94 30.8,9.26 31.91,9.26 36.83,14.18 52.23,14.18 v55.88,17.83 | SEV6.3 74.77,59.26 73.66,60.38 71.76,60.38 70.64,59.26 67.31,59.26 SEV5.3
  Bottom 0.229: SEV5.3 67.15,59.26 64.29,56.41 64.29,29.42 61.91,27.04 61.91,23.23 59.06,20.37 IC3.17 58.9,20.21 58.26,20.21 v55.88,17.83
STA  (via drill 0.3)
  Top 0.229: v101.09,35.61 109.22,27.48 109.22,23.77 111.03,21.96 116.84,21.96 119.86,18.94 123.51,18.94 125.1,17.35 125.1,17.04 J1.3
  Bottom 0.229: v101.09,35.61 101.09,35.64 90.17,46.56 FEATHERM0.17